# Altium PCB CHILD_BOARD_revA.PcbDoc (part 2 of 2)
Units mil, origin at the board's own origin, x right, y up, seen from the top; angles counter-clockwise.
Board outline 6000 x 4000 mil, 2 copper layers (Top Layer, Bottom Layer); 300 components, 212 nets, 880 pads, 8 vias.
Unrouted connection lines stored in the file: 627.
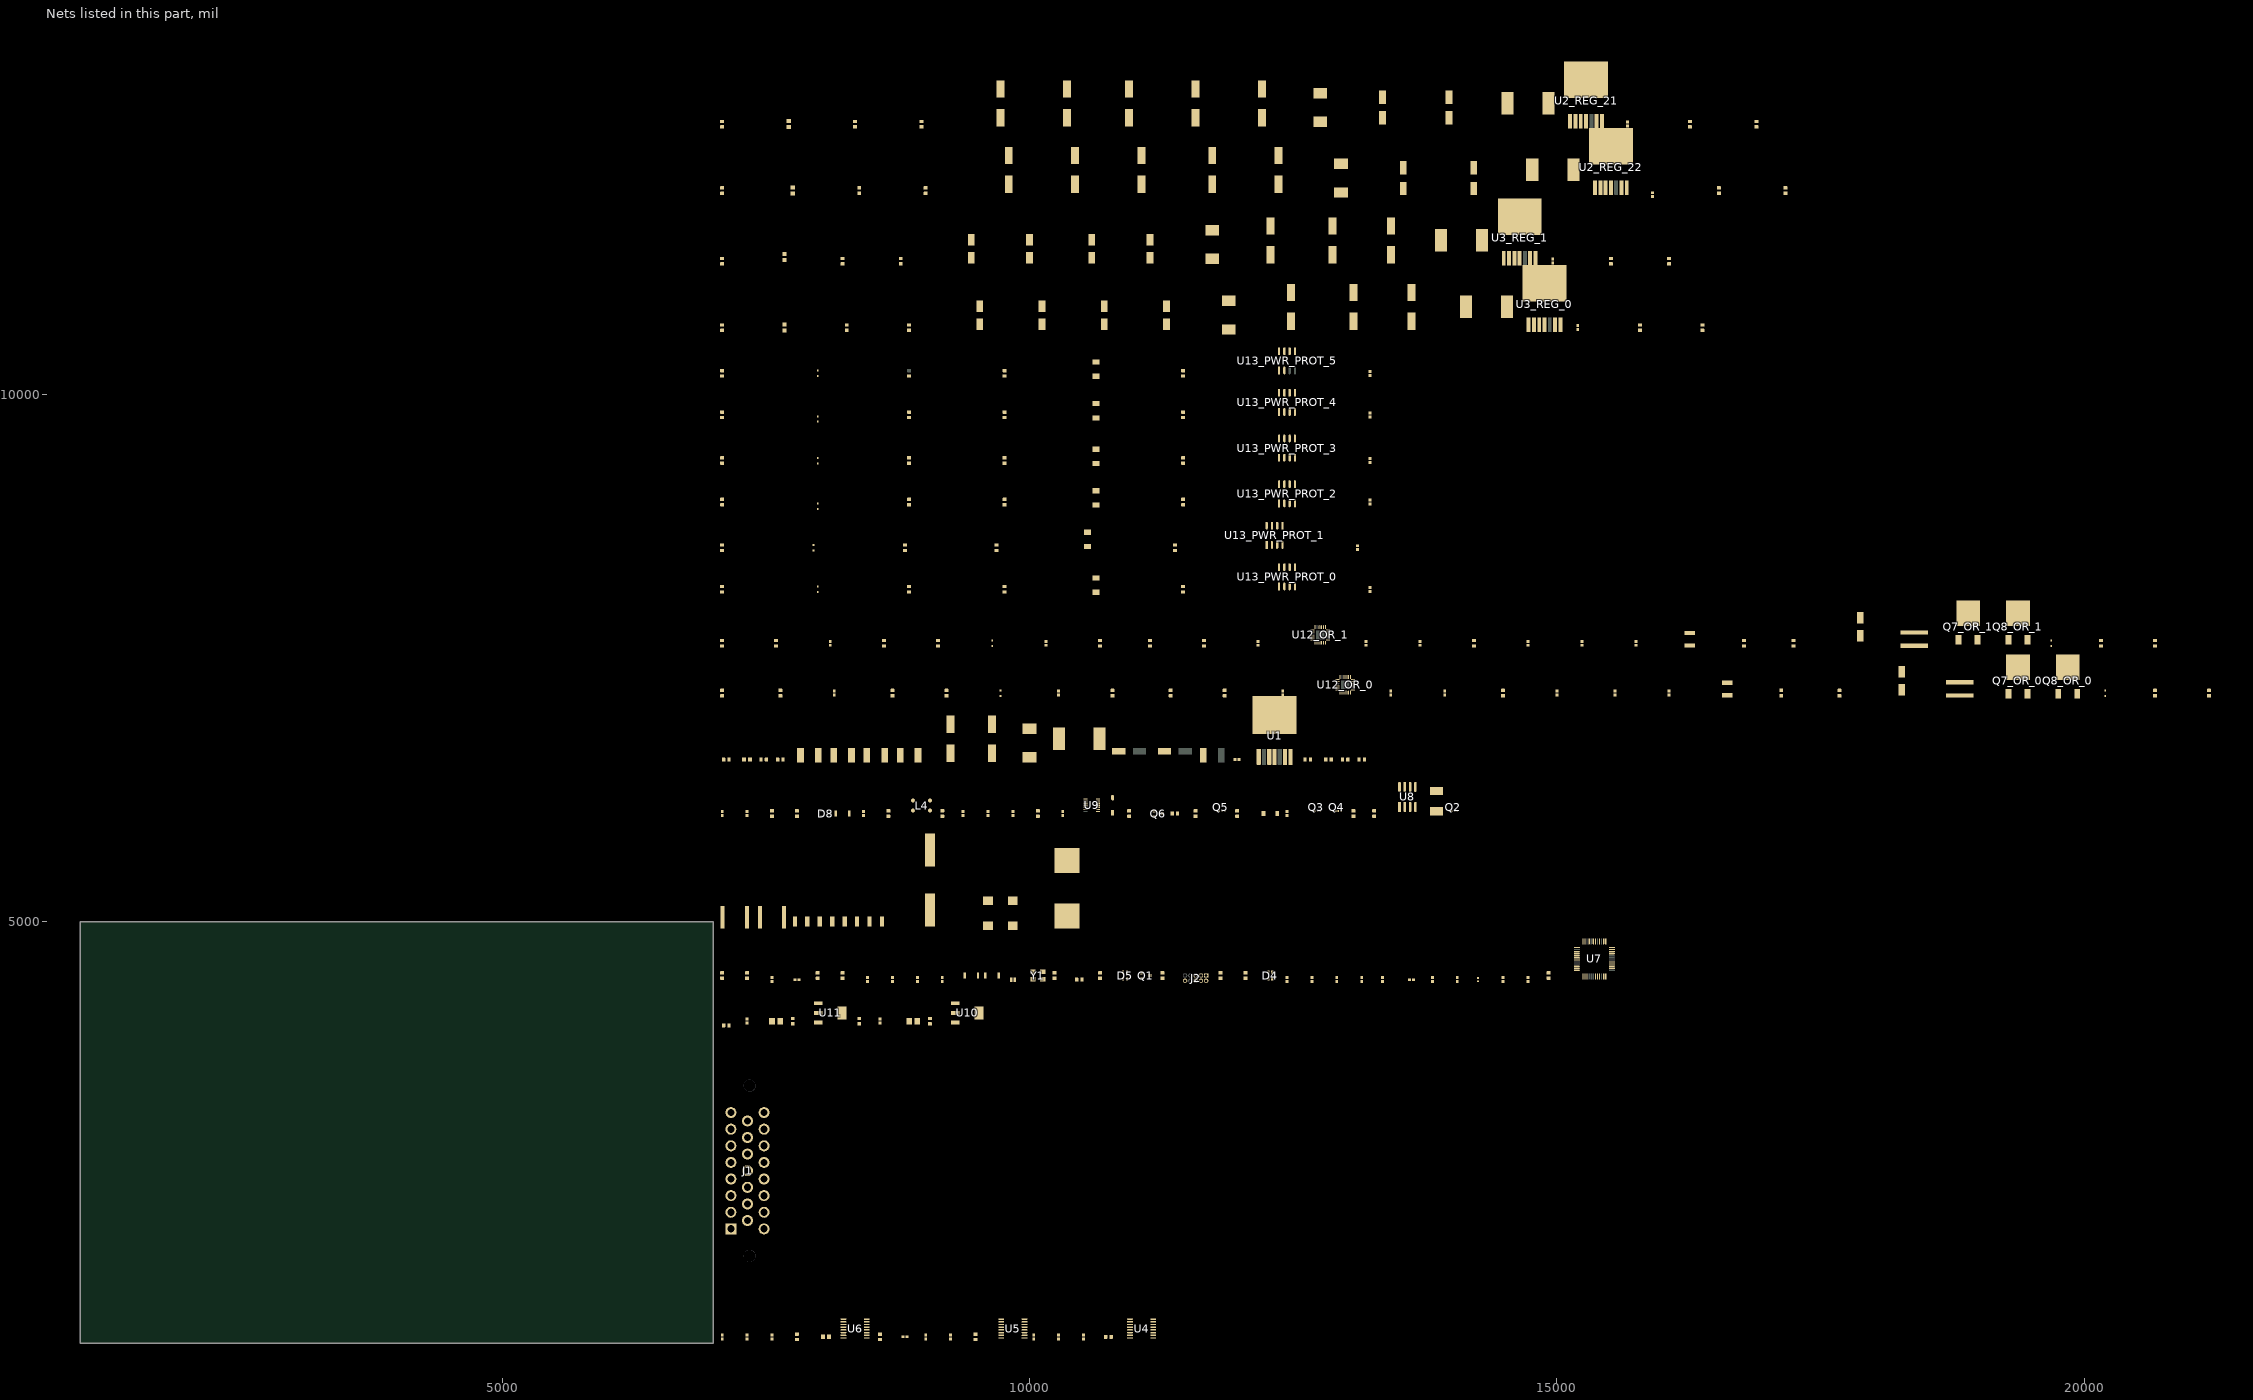
[diagram p2: the nets of this part, all layers, seen from the top]

## Part data
C1 C2 C12_REG_21 C12_REG_22 C13_REG_21 C13_REG_22: library part CMP-05428-001211-1, "Conductive Polymer Hybrid Aluminum Electrolytic Capacitors 68uF ±20% 35V RADIAL SMT 6.3x7.7mm", Capacitance=68uF, Case/Package=Radial, ESR (Equivalent Series Resistance)=35mR, Leakage Current=23.8uA, Max Operating Temperature=105°C, Min Operating Temperature=-55°C, Package Quantity=900, Ratings=AEC-Q200, Ripple Current=2A, Tolerance=20%, Voltage=35V, Construction=Cylindrical, Diameter=6.3mm, Height=7.7mm, Height - Seated (Max)=0.315inch, Lead Diameter=0.65mm, Lead Free="Lead Free", Lead Pitch=1.8mm, Length=7.7mm, Life (Hours)=5000Hour, Material=Polymer, Mount="Surface Mount", Number of Pins=8, Packaging="Tape and Reel", Polarity=Polar, Radiation Hardening=No, REACH SVHC="No SVHC", Ripple Current (AC)=2A, Series=ZA, Technology=HYBRID, Termination=SMD/SMT, Voltage Rating=35V, Voltage Rating (DC)=35V
C3 C7 C8 C9 C10: library part CMP-1040-01539-1, "CAP 470nF 50V ±10% 1812 (4532 Metric) Thickness 1.25mm SMD", Case-EIA=1812, Case-Metric=4532, Rated Voltage="50 V", Tolerance=Â±10%, Max Thickness="1.25 mm", Technology=SMT
C4 C11_REG_21 C11_REG_22 C19_REG_0 C19_REG_1 C27 C28 C29 C30 C31 C32 C33 C34 C35 C36 C37 C38 C39 C40 C41 C42 C43 C44 C45 C46 C47 C48 C49 C50 C51 C52 C53 C54 C55 C56 C57 C58 C59 C60 C62 C66_OR_0 C66_OR_1 C67_OR_0 C67_OR_1 C68_OR_0 C68_OR_1 C69_OR_0 C69_OR_1 C70_OR_0 C70_OR_1 C71_OR_0 C71_OR_1 C72_OR_0 C72_OR_1 C73_OR_0 C73_OR_1 C74_PWR_PROT_0 C74_PWR_PROT_1 C74_PWR_PROT_2 C74_PWR_PROT_3 C74_PWR_PROT_4 C74_PWR_PROT_5: library part CMP-001-00058-1, "LARGE PADS, 0402 CAP, CHANGE COMMENT TO MATCH REAL P/N", Capacitor Type=Ceramic, Case/Package=0402, Max Operating Temperature=85°C, Min Operating Temperature=-55°C, Mounting Technology="Surface Mount", Pins=2, RoHS Compliant=Yes
C5 C6 C14_REG_21 C14_REG_22 C15_REG_21 C15_REG_22 C16_REG_21 C16_REG_22 C17_REG_21 C17_REG_22 C18_REG_21 C18_REG_22: library part CMP-05428-000021-2, "Conductive Polymer Aluminum Solid Capacitors (OS-CON) 120uF ±20% 16V RADIAL SMT 8x6.9mm", Capacitance=120uF, Case/Package=Radial, ESR (Equivalent Series Resistance)=27mR, Leakage Current=500uA, Max Operating Temperature=105°C, Min Operating Temperature=-55°C, Package Quantity=1000, Ripple Current=2.9A, Tolerance=20%, Voltage=16V, Construction=Cylindrical, Diameter=8mm, Dissipation Factor=12%, Height=6.9mm, Height - Seated (Max)=0.276inch, Lead Free="Lead Free", Length=6.9mm, Life (Hours)=2000Hour, Mount="Surface Mount", Number of Pins=7, Packaging="Tape and Reel", Polarity=Polar, REACH SVHC="No SVHC", Ripple Current (AC)=2.9A, RoHS Compliant=Yes, Series="OS-CON, SVPC", Termination=SMD/SMT, Voltage Rating=16V, Voltage Rating (DC)=16V
C20_REG_0 C20_REG_1 C21_REG_0 C21_REG_1 C22_REG_0 C22_REG_1: library part CMP-05428-001387-1, "Conductive Polymer Aluminum Solid Capacitors (OS-CON) 33uF ±20% 20V RADIAL SMT 8x6.9mm", Capacitance=33uF, Case/Package=Radial, ESR (Equivalent Series Resistance)=45mR, Leakage Current=132uA, Max Operating Temperature=105°C, Min Operating Temperature=-55°C, Package Quantity=1000, Ripple Current=1.89A, Tolerance=20%, Voltage=20V, Construction=Cylindrical, Diameter=8mm, Dissipation Factor=12%, Height=6.9mm, Height - Seated (Max)=0.276inch, Length=6.9mm, Life (Hours)=2000Hour, Mount="Surface Mount", Number of Pins=7, Packaging="Tape and Reel", Polarity=Polar, REACH SVHC="No SVHC", Ripple Current (AC)=1.89A, RoHS Compliant=Yes, Series="OS-CON™, SVP", Termination=SMD/SMT, Voltage Rating=20V, Voltage Rating (DC)=20V
C23_REG_0 C23_REG_1 C24_REG_0 C24_REG_1 C25_REG_0 C25_REG_1 C26_REG_0 C26_REG_1: library part CMP-05427-000047-1, "CAP ALUM 100UF 20% 10V SMD", Capacitance=100uF, Case/Package=Radial, Max Operating Temperature=85°C, Min Operating Temperature=-40°C, Package Quantity=1, Ripple Current=50mA, Tolerance=20%, Voltage Rating=10V, Construction=Cylindrical, Contact Plating=Tin, Diameter=5mm, Height=5.4mm, Height - Seated (Max)=0.213inch, Lead Free="Lead Free", Length=5.5mm, Life (Hours)=1000Hour, Mount="Surface Mount", Packaging="Tape and Reel", Radiation Hardening=No, Ripple Current (AC)=50mA, RoHS Compliant=Yes, Series=S, Termination=SMD/SMT, Voltage Rating (DC)=10V
C61 C63: library part CMP-001-00000-11, "Non-polarized capacitor"
C64_OR_0 C64_OR_1: library part CMP-05427-000030-1, "CAP ALUM 10UF 20% 50V SMD", Capacitance=10uF, Case/Package=Radial, Dielectric Material=Aluminium, ESR (Equivalent Series Resistance)=1.52R, Leakage Current=3uA, Max Operating Temperature=105°C, Min Operating Temperature=-55°C, Package Quantity=1000, Ripple Current=85mA, Tolerance=20%, Voltage=50V, Construction=Cylindrical, Contact Plating=Tin, Diameter=5mm, Height=5.8mm, Height - Seated (Max)=0.228inch, Impedance=1.52R, Lead Free="Lead Free", Length=5.8mm, Life (Hours)=2000Hour, Material=Aluminium, Mount="Surface Mount", Number of Pins=2, Packaging="Tape and Reel", Radiation Hardening=No, REACH SVHC="No SVHC", Ripple Current (AC)=85mA, RoHS Compliant=Yes, Series=FK, Termination=SMD/SMT, Voltage Rating=50V, Voltage Rating (DC)=50V, Width=6.5mm
C65_OR_0 C65_OR_1 C80 C81 C82 C83: library part CMP-2000-05477-2, "General Purpose Ceramic Capacitor, 1210, 10uF, 10%, X5R, 15%, 25V", Capacitance=10uF, Case Code (Imperial)=1210, Case Code (Metric)=3225, Dielectric=X5R, Max Operating Temperature=85°C, Min Operating Temperature=-55°C, Package Quantity=1, Tolerance=10%, Voltage=25V, Case/Package=1210, Construction=Flat, Contact Plating=Tin, Depth=2.5mm, Height=2.29mm, Lead Free="Lead Free", Length=3.2mm, Mount="Surface Mount", Packaging="Tape and Reel", Radiation Hardening=No, REACH SVHC="No SVHC", RoHS Compliant=Yes, Series=-, Termination=SMD/SMT, Thickness=0.11inch, Voltage Rating=25V, Voltage Rating (DC)=25V, Width=0.098inch
C75: library part CMP-001-00064-1, "Aluminum Electrolytic Capacitor, Polarized, Aluminum (wet), 100V, 20% +Tol, 20% -Tol, 470uF, Surface Mount, 7171", Capacitor Type=Aluminium, Case/Package=7171, Max Operating Temperature=105°C, Min Operating Temperature=-40°C, Pins=2, RoHS Compliant=Yes
C76 C77: library part CMP-2000-07204-2, "CAP TANT 100UF 10% 25V 2917", Capacitance=100uF, Case Code (Imperial)=2917, Case Code (Metric)=7343, Dielectric Material=Tantalum, ESR (Equivalent Series Resistance)=300mR, Leakage Current=25uA, Max Operating Temperature=125°C, Min Operating Temperature=-55°C, Package Quantity=1, Ripple Current=742mA, Tolerance=10%, Voltage=25V, Case/Package=2917, Construction=Flat, Depth=4.3mm, Dissipation Factor=8%, Failure Rate=0.001%, Features="General Purpose", Height=4mm, Height - Seated (Max)=0.169inch, Lead Free="Lead Free", Length=7.3mm, Life (Hours)=2000Hour, Mount="Surface Mount", Number of Pins=2, Packaging="Tape and Reel", Polarity=Polar, Radiation Hardening=No, REACH SVHC="No SVHC", RoHS Compliant=No, Series=T491, Termination=SMD/SMT, Voltage Rating=25V, Voltage Rating (DC)=25V, Width=4.3mm
C78 C79: library part CMP-2000-07446-2, "Cap Ceramic 15uF 100V X7S 20% Pad SMD 2220 +125°C Automotive T/R", Capacitance=15uF, Case Code (Imperial)=2220, Case Code (Metric)=5750, Dielectric=X7S, Max Operating Temperature=125°C, Min Operating Temperature=-55°C, Package Quantity=1, Ratings=AEC-Q200, Tolerance=20%, Voltage Rating=100V, Case/Package=2220, Composition=Ceramic, Depth=5mm, Height=2.3mm, Lead Free="Lead Free", Length=5.7mm, Mount="Surface Mount", Packaging="Tape and Reel", REACH SVHC="No SVHC", Termination=SMD/SMT, Thickness=0.098inch, Voltage Rating (DC)=100V, Weight=0.016932oz, Width=0.197inch
D1 D2_REG_21 D2_REG_22 D3_REG_0 D3_REG_1: library part CMP-2000-05097-3, "DIODE SCHOTTKY 40V 5A SMC", Capacitance=300pF, Forward Current=5A, Manufacturer="Diodes Inc.", Max Junction Temp=+150°C, Max Repetitive Reverse Voltage=40V, Max Surge Forward Current=100A, Package=SMC, Peak Reverse Current=0.5mA, Temperature="-55°C to +150°C", Temperature Range Low=-55°C, Automotive=No, Automotive Grade=NA, Category=Diode, ComponentLink2Description=Datasheet, ComponentLink2URL=https://www.diodes.com/assets/Datasheets/ds13012.pdf, Device Class L1="Discrete Semiconductors", Device Class L2=Diodes, Device Class L3="Schottky Diodes", Digikey Description="DIODE SCHOTTKY 40V 5A SMC", Footprint Url=https://www.diodes.com/assets/Package-Files/SMC.pdf, Height=2.5mm, Lead Free=Yes, Manufacturer Part Number=B540C-13-F, Mouser Description="Diode: Schottky rectifying; SMD; 40V; 5A; SMC; Package: reel, tape", Octopart=https://octopart.com/b540c-13-f-diodes+inc.-325873, Reverse Voltage=40V, RoHS=TRUE, Standoff Height=0.1mm, Temperature Range High=+150°C
D4 D5: library part CMP-004-00040-2, "Led, Red/Grn, 180Mcd/230Mcd, 624Nm/525Nm Rohs Compliant: Yes", Component Type=Standard, Design Item ID=CMP-004-00034-2, Pins=4, Source=rgled.SchLib
D6: library part CMP-1060-00565-1, "Zener Voltage Regulator, 500 mW, 2-Pin SOD-123, Pb-Free, Tape and Reel", Manufacturer="On Semiconductor", ComponentLink1Description="Manufacturer URL", ComponentLink1URL=http://www.onsemi.com/, ComponentLink2Description=Datasheet, ComponentLink2URL=http://www.onsemi.com/pub_link/Collateral/MMSZ5221BT1-D.PDF, ComponentLink3Description="Package Specification", ComponentLink3URL=http://www.onsemi.com/pub_link/Collateral/425-04.PDF, DatasheetVersion="Rev. 12", Mounting Technology="Surface Mount", P Max (W)=0.5, PackageDescription="2-Pin SOD, Body 1.6 x 2.69 mm", PackageReference=SOD-123-2-425-04, PackageVersion="Rev. G, 10/2009", Packing="Tape and Reel", PartNumber=MMSZ5242BT1G, RoHS=Pb-Free, VZ Typ (V)=12
D7: library part CMP-2000-04993-2, "DIODE GEN PURP 100V 150MA SOD123", Average Rectified Current=150mA, Capacitance=4pF, Forward Voltage=1V, Max Forward Surge Current (Ifsm)=1A, Max Operating Temperature=150°C, Max Repetitive Reverse Voltage (Vrrm)=100V, Max Reverse Leakage Current=5uA, Max Surge Current=2A, Min Operating Temperature=-65°C, Package Quantity=3000, Power Dissipation=400mW, Current Rating=150mA, Element Configuration=Single, Forward Current=150mA, Height=1.2mm, Lead Free="Lead Free", Length=2.85mm, Max Reverse Voltage (DC)=100V, Mount="Surface Mount", Number of Pins=2, Output Current=150mA, Packaging="Tape and Reel", Peak Non-Repetitive Surge Current=2A, Polarity=Standard, Radiation Hardening=No, Recovery Time=4ns, Reverse Recovery Time=4ns, Voltage Rating (DC)=100V, Width=1.8mm
D8: library part CMP-12225-000055-1, "TVS DIODE 26.5V 44V SOT323-3", Breakdown Voltage=28.5V, Capacitance=3pF, Clamping Voltage=44V, Manufacturer=STMicroelectronics, Max Junction Temp=+175°C, Package=SOT323-3L, Peak Pulse Current=3A, Peak Pulse Power=170W, Reverse Standoff Voltage=26.5V, Temperature="-55°C to +175°C", Temperature Range Low=-55°C, Automotive=Yes, Automotive Grade="Grade 0", Category=Diode, ComponentLink2Description=Datasheet, ComponentLink2URL=https://www.st.com/resource/en/datasheet/esdcan02-2bwy.pdf, Device Class L1="Circuit Protection", Device Class L2="TVS Diodes", Device Class L3=unset, Digikey Description="TVS DIODE 26.5V 44V SOT323-3", Direction=Bidirectional, Height=1.1mm, Ipc Land Pattern Name=SOT65P210X95-3, Lead Free=Yes, Manufacturer Part Number=ESDCAN02-2BWY, Mouser Description="TVS Diodes / ESD Suppressors Automotive dual-line Transil, Transient voltage suppressor (TVS) for CAN bus", Number Of Channels=2, Octopart=https://octopart.com/esdcan02-2bwy-stmicroelectronics-58631133, RoHS=TRUE, Standoff Height=0mm, Temperature Range High=+175°C
D9_OR_0 D9_OR_1 D10_OR_0 D10_OR_1 D11_PWR_PROT_0 D11_PWR_PROT_1 D11_PWR_PROT_2 D11_PWR_PROT_3 D11_PWR_PROT_4 D11_PWR_PROT_5: library part CMP-1060-00750-1, "Zener Voltage Regulator, 500 mW, 2-Pin SOD-523, Pb-Free, Tape and Reel", Manufacturer="On Semiconductor", PartNumber=MM5Z3V3T1G, ComponentLink1Description="Manufacturer URL", ComponentLink1URL=http://www.onsemi.com/, ComponentLink2Description=Datasheet, ComponentLink2URL=http://www.onsemi.cn/pub_link/Collateral/MM5Z2V4T1-D.PDF, ComponentLink3Description="Package Specification", ComponentLink3URL=http://www.onsemi.com/pub_link/Collateral/502-01.PDF, DatasheetVersion="Rev. 10", Mounting Technology="Surface Mount", P Max (W)=0.5, PackageDescription="2-Pin SOD, Body 1.2 x 0.8 mm", PackageReference=SOD-523-2-502-01, PackageVersion="Rev. E, 09/2010", Packing="Tape and Reel", RoHS=Pb-Free, VZ Typ (V)=3.3
F1: library part CMP-16042-000002-1, "DIFF P#!!! /  / FUSE BRD MNT 10A 125VAC/VDC", Fuse Current=15A, Fuse Interrupt Ac Current=50A, Fuse Interrupt Dc Current=300A, Fuse Voltage Drop=0.13V, Manufacturer="Bel Fuse", Manufacturer Part Number=0679L9150-01, Max Fuse Ac Voltage=125V, Package=0679L, Resistance=0.0038Ω, Temperature="-55°C to +125°C", Temperature Range High=+125°C, Temperature Range Low=-55°C, Automotive=Yes, Automotive Grade="Grade 1", Category=Fuse, ComponentLink2Description=Datasheet, ComponentLink2URL=https://www.belfuse.com/resources/CircuitProtection/datasheets/0679L%20Sep2016.pdf, Device Class L1="Circuit Protection", Device Class L2=Fuses, Device Class L3=unset, Digikey Description="FUSE BRD MNT 15A 125VAC/VDC", Fuse Blow Speed=Fast, Fuse I2T=103.5A2Sec, Height=2.79mm, Ipc Land Pattern Name=CAPC610254X254, Lead Free=Yes, Max Fuse Dc Voltage=125V, Octopart=https://octopart.com/0679l9150-01-bel+fuse-70850665, RoHS=TRUE, Voltage Rating=125V
F2_PWR_PROT_0 F2_PWR_PROT_1 F2_PWR_PROT_2 F2_PWR_PROT_3 F2_PWR_PROT_4 F2_PWR_PROT_5: library part CMP-07399-000013-1, "FUSE BOARD MOUNT 2A 63VDC 1206", Case Code (Imperial)=1206, Case Code (Metric)=3216, Current Rating=2A, Max Operating Temperature=105°C, Min Operating Temperature=-20°C, Voltage Rating (DC)=63V, Approvals=UL, Case/Package=1206, Fuse Type="Board Mount (Cartridge Style Excluded)", Mount="Surface Mount", Packaging="Cut Tape", RoHS Compliant=Yes, Series="SinglFuse™ SF-1206FP"
FB1: library part CMP-0686-00252-4, "Chip Ferrite Bead, 0402, 600Ω @ 100MHz, 0.23Ω, 25%, 900mA", Case Code (Imperial)=0402, Case Code (Metric)=1005, Current Rating=900mA, DC Resistance (DCR)=230mR, Max Operating Temperature=125°C, Min Operating Temperature=-55°C, Package Quantity=10000, Test Frequency=100MHz, Tolerance=25%, Case/Package=0402, Height=0.5mm, Impedance=600R, Lead Free="Lead Free", Length=1mm, Material=Steel, Max Current Rating=900mA, Max DC Current=900mA, Number of Circuits=1, Number of Lines=1, Number of Pins=2, Packaging="Tape and Reel", Termination=SMD/SMT, Width=0.5mm
J1: library part CMP-03369-000157-2, "CONN HEADER R/A 23POS 4MM", Color=Black, Current Rating=17A, Flammability Rating="UL94 V-0", Max Operating Temperature=221°C, Max Voltage Rating (AC)=250V, Min Operating Temperature=-40°C, Package Quantity=1, Circuit Application=Power, Connector System=Wire-to-Device, Connector Type=Header, Contact Finish - Mating=TIN, Contact Material=Brass, Contact Plating=Tin, Contact Shape=Circular, Contact Type="Male Pin", Depth=37.9mm, ELV=Compliant, Fastening Type=Ramp, Gender=Male, Housing Color=Black, Housing Material=Polybutylene, Insulation Color=Black, Insulation Material=PBT, Lead Free="Lead Free", Length=60.8mm, Mount="Through Hole", Number of Contacts=23, Number of Ports=1, Number of Positions=23, Number of Rows=3, Number of Signal Positions=23, Number of Terminals/Pins=23, Orientation="Right Angle", Packaging=Bulk, PCB Mount Alignment="Yes (With)", PCB Mount Retention=With, PCB Thickness=0.062inch, Pitch=0.157inch, Primary Type=Rectangular, Radiation Hardening=No, RoHS Compliant=Yes, Row Spacing=0.157inch, Sealable="Yes (With)", Series=Ampseal, Shielding=Unshielded, Tab Thickness=1.3mm, Termination=Solder, Voltage Rating (AC)=250V, Width=37.9mm
J2: library part CMP-002-00041-5, "Board Connector, 10 Contact(s), 2 Row(s), Male, Right Angle, 0.05 inch Pitch, Surface Mount Terminal, Locking, Black Insulator", Connector Type="BOARD CONNECTOR", Mounting Technology=Board, RoHS Compliant=Yes
L1: library part CMP-2000-07146-2, "FIXED IND 15UH 5A 27 MOHM SMD", Case/Package=1260, Current Rating=5A, DC Resistance (DCR)=27mR, Frequency=17.6MHz, Inductance=15uH, Inductance Tolerance=20%, Max Operating Temperature=125°C, Min Operating Temperature=-40°C, Package Quantity=600, Resistance=27MR, Resistor Type=Wirewound, Saturation Current=4.6A, Test Frequency=100kHz, Core Material=Ferrite, DC Current=5A, Depth=12.8mm, Height=6mm, Height - Seated (Max)=0.256inch, Length=12.5mm, Material=Steel, Max DC Current=5A, Military Standard=Not, Mount="Surface Mount", Number of Pins=2, Packaging="Tape and Reel", Q Factor=25, REACH SVHC="No SVHC", RMS Current (Irms)=5A, RoHS Compliant=Yes, Sample Rate (Hz)=100kHz, Self Resonant Frequency=17.6MHz, Series=SRR1260, Shielding=Shielded, Termination=SMD/SMT, Tolerance=20%, Width=12.5mm
L2_REG_21 L2_REG_22 L3_REG_0 L3_REG_1: library part CMP-0227-00708-1, "SMD-Shielded Power Inductor WE-PD, L = 10.0 µH", Inductance="10.0 ÂµH", ComponentLink1Description="Manufacturer Link", ComponentLink1URL=http://www.we-online.com, ComponentLink2Description=Datasheet, ComponentLink2URL=http://www.we-online.de/katalog/media/pdf/74477110.pdf, DatasheetVersion="ver 7, Sep-2006", PackageDescription="SMD Inductor, 2-Leads, Body 12.0 x 12.0 mm", PackageReference=WE-PD-L, PackageVersion=2006
L4: library part CMP-07251-000006-1, "CMC 51UH 200MA 2LN 2KOHM SMD", Case/Package=4532, Current=200mA, DC Resistance (DCR)=3.5R, Inductance=51uH, Insulation Resistance=10MR, Max Operating Temperature=125°C, Min Operating Temperature=-40°C, Package Quantity=1, Resistance=2kR, Self Resonant Frequency=100kHz, Tolerance=50%, Voltage Rating (DC)=50V, Contact Plating=Tin, Core Material=Ferrite, Current Rating=200mA, DC Current=200mA, Depth=3.4mm, Element Configuration=Dual, Height=0.118inch, Impedance=2kR, Lead Free="Lead Free", Length=4.5mm, Material=Steel, Max DC Current=200mA, Mount="Surface Mount", Number of Lines=2, Packaging="Tape and Reel", REACH SVHC="No SVHC", RoHS Compliant=Yes, Series=SRF4532, Termination=SMD/SMT, Test Frequency=100kHz, Width=0.126inch
L5: library part CMP-0226-00001-2, Ambient Temperature Range High=100°C, Ambient Temperature Range Low=-40°C, DC Resistance (DCR)=6.9mΩ, Inductance=10µH, Inductance Tolerance=20%, Max Operating Temperature=150°C, Saturation Current=10A, Self Resonant Frequency=14MHz, Height=8.9mm, Length=18.3mm, Min Operating Temperature=-40°C, NexarPartId=22803350, Number of Pins=2, Packaging="Cut Tape (CT)", RoHS=Compliant, Width=18.2mm
Q1: library part CMP-2000-06170-1, "P-Channel Enhancement Mode MOSFET, 310 mW, 20 V, -55 to 150 degC, 3-Pin SOT-323, RoHS, Tape and Reel", Drain-Source On Resistance-Max=750mO, Drain-to-Source Voltage [Vdss]=20V, Manufacturer="Diodes Inc", Package Description="3-Pin Small Outline Transistor, Body 2 x 1.25 mm, Pitch 0.65 mm", Package Reference=SOT323, Rated Power Dissipation=310mW, Channel Type=P-Channel, Datasheet URL=http://www.diodes.com/_files/datasheets/ds31861.pdf, Datasheet Version="Rev. 3-2, 09/2013", Manufacturer URL=http://www.diodes.com/, Mounting Technology=SurfaceMount, Qg Gate Charge=0.622nC
Q2 Q3 Q4 Q5: library part CMP-013-00018-2, "Trans MOSFET P-CH 20V 22.1A 8-Pin PowerPAK 1212 EP T/R", Component Type=Standard, Design Item ID=CMP-013-00036-4, Pins=5, Source=SISH615ADN-T1-GE3.SchLib
Q6: library part CMP-2000-05968-1, "N-Channel Enhancement Mode Mosfet, 50 V, 200 mA, -55 to 150 degC, 6-Pin SOT-323, RoHS, Tape and Reel", Id - Continuous Drain Current=200mA, Manufacturer=DiodesIncorporated, Maximum Operating Temperature=+150C, Minimum Operating Temperature=-55C, Package / Case=SOT-323-3, Package Description="3-Pin Small Outline Transistor, Body 2 x 1.25 mm, Pitch 0.65 mm", Package Reference=SOT323, Pd - Power Dissipation=200mW, Rds On - Drain-Source Resistance=1.4Ohms, Vds - Drain-Source Breakdown Voltage=75V, Vgs - Gate-Source Voltage=20V, Brand=DiodesIncorporated, Channel Mode=Enhancement, Configuration=Single, Datasheet URL=http://www.diodes.com/_files/datasheets/ds30206.pdf, Datasheet Version="Rev. 11-2, 09/2013", Factory Pack Quantity=3000, Forward Transconductance - Min=0.1S, Height=1mm, Length=2.2mm, Manufacturer URL=http://www.diodes.com/, Mounting Style=SMD/SMT, Mounting Technology=SurfaceMount, Number Of Channels=1Channel, Packaging=Reel, Product=MOSFETSmallSignal, Product Category=MOSFET, RoHS=True, Series=BSS138, Technology=Si, Transistor Polarity=N-Channel, Transistor Type=1N-Channel, Type=EnhancementModeFieldEffectTransistor, Typical Turn-Off Delay Time=20ns, Typical Turn-On Delay Time=20ns, Unit Weight=0.000212oz, Width=1.35mm
Q7_OR_0 Q7_OR_1 Q8_OR_0 Q8_OR_1: library part CMP-02550-000179-1, "MOSFET N-CH 150V 42A TO252AA", Continuous Drain Current=42A, Drain To Source Breakdown Voltage=150V, Drain To Source Resistance=0.0372Ω, Gate To Source Voltage=20V, Input Capacitace At Vds="560pF @ 50V", Manufacturer=Vishay, Max Forward Diode Voltage=1.5V, Max Junction Temp=+175°C, Package=T16-0236, Power Dissipation=65.2W, Pulse Drain Current=40A, Temperature="-55°C to +175°C", Temperature Range Low=-55°C, Typ Forward Diode Voltage=0.85V, Automotive=No, Category=Trans, ComponentLink2Description=Datasheet, ComponentLink2URL=https://www.vishay.com/docs/76248/sud80460e.pdf, Depletion Mode=False, Device Class L1="Discrete Semiconductors", Device Class L2=Transistors, Device Class L3=MOSFETs, Digikey Description="MOSFET N-CH 150V 42A TO252AA", Drain To Source Voltage=150V, Footprint Url=https://www.vishay.com/docs/71197/to252aa.pdf, Gate Charge At Vgs="10.5nC @ 10V", Height=2.507mm, Lead Free=Yes, Manufacturer Part Number=SUD80460E-GE3, Number Of Channels=1, Number Of N Channels=1, Octopart=https://octopart.com/sud80460e-ge3-vishay-78440626, Reverse Recovery Charge=210nC, Reverse Recovery Time=68ns, RoHS=TRUE, Rthja Max=50°C/W, Temperature Range High=+175°C, Threshold Vgs Max=4V, Threshold Vgs Min=2V, Transconductance=11S, Turn Off Delay Time=15ns, Turn On Delay Time=8ns
R1 R2 R3 R4 R5 R6 R7 R9_REG_21 R9_REG_22 R10_REG_21 R10_REG_22 R11_REG_21 R11_REG_22 R12_REG_21 R12_REG_22 R13_REG_21 R13_REG_22 R15_REG_0 R15_REG_1 R16_REG_0 R16_REG_1 R17_REG_0 R17_REG_1 R18_REG_0 R18_REG_1 R19_REG_0 R19_REG_1 R21 R22 R23 R25 R26 R27 R28 R29 R30 R31 R32 R33 R34 R35 R36 R37 R38 R39 R40 R41 R42 R43 R44 R45 R46 R47 R48 R49 R50 R51 R52_OR_0 R52_OR_1 R53_OR_0 R53_OR_1 R55_OR_0 R55_OR_1 R56_OR_0 R56_OR_1 R57_OR_0 R57_OR_1 R58_OR_0 R58_OR_1 R59_OR_0 R59_OR_1 R60_OR_0 R60_OR_1 R61_OR_0 R61_OR_1 R62_OR_0 R62_OR_1 R63_OR_0 R63_OR_1 R64_OR_0 R64_OR_1 R65_PWR_PROT_0 R65_PWR_PROT_1 R65_PWR_PROT_2 R65_PWR_PROT_3 R65_PWR_PROT_4 R65_PWR_PROT_5 R66_PWR_PROT_0 R66_PWR_PROT_1 R66_PWR_PROT_2 R66_PWR_PROT_3 R66_PWR_PROT_4 R66_PWR_PROT_5 R67_PWR_PROT_0 R67_PWR_PROT_1 R67_PWR_PROT_2 R67_PWR_PROT_3 R67_PWR_PROT_4 R67_PWR_PROT_5 R68_PWR_PROT_0 R68_PWR_PROT_1 R68_PWR_PROT_2 R68_PWR_PROT_3 R68_PWR_PROT_4 R68_PWR_PROT_5: library part CMP-009-00002-14, "Resistor"
R8 R14_REG_21 R14_REG_22 R20_REG_0 R20_REG_1 R24: library part CMP-2000-00869-1, Manufacturer=Panasonic, Part Number=ERT-J1VR103J
R54_OR_0 R54_OR_1: library part CMP-00597-24927456-1, "KRL6432E-M-R003-F-T1 Metal Foil Low Resistance Chip Resistor (long-side terminal), 2512, RoHS", Case Code (Imperial)=2512, Case Code (Metric)=6432, Max Operating Temperature=155°C, Min Operating Temperature=-55°C, Power Rating=3W, Resistance=3mΩ, Temperature Coefficient=50ppm/°C, Tolerance=1%, Case/Package=2512, Composition="Metal Foil", Height=700µm, Length=3.1mm, Lifecycle Status=Production, Max Thickness=700µm, NexarPartId=24927456, RoHS=Compliant, Termination=SMD/SMT, Weight=40.511469mg, Width=6.3mm
SW1 SW2 SW3: library part CMP-10040-000029-1, "SWITCH TACTILE SPST-NO 0.02A 15V", Current Rating=5A, Flammability Rating="UL94 V-0", Insulation Color=Black, Max Operating Temperature=85°C, Min Operating Temperature=-40°C, Operating Force=240gf, Actuator Type=Standard, Connector Type=USB, Contact Plating=Gold, Gender=Receptacle, Illumination Type=Non-Illuminated, Mechanical Life=500000Cycles, Mount="Surface Mount", Number of Contacts=24, Number of Ports=1, Packaging="Tape and Reel", Switch Function=Off-Mom, Switch Travel=0.13mm, Termination=Solder, Throw Configuration=SPST
U1: library part CMP-0069-00211-3, "SIMPLE SWITCHER® High Efficiency 5A Step-Down Voltage Regulator with Sync, 7-pin TO-263", Manufacturer="Texas Instruments", PackageTopMarking=NSUZXYTTE#*LM2677S*-ADJ, PowerWise=N, Code_JEDEC=MO-169-AC, ComponentLink1Description="Datasheet URL", ComponentLink1URL=http://www.ti.com/general/docs/lit/getliterature.tsp?genericPartNumber=LM2677&fileType=pdf, CompType=Switcher, PackageDescription="TO-263, Molded, .400 x .390 x .180in Body, 7 Lead, .050in Pitch, Surface Mount", PackageReference=KTW0007B, PinCount=7, RoHS=N
U2_REG_21 U2_REG_22: library part CMP-0069-00195-3, "SIMPLE SWITCHER® High Efficiency 5A Step-Down Voltage Regulator, 7-pin TO-263, Pb-Free", Manufacturer="Texas Instruments", PackageTopMarking=NSUZXYTTE#*LM2678*S-3.3, PowerWise=N, Code_JEDEC=MO-169-AC, ComponentLink1Description="Datasheet URL", ComponentLink1URL=http://www.ti.com/general/docs/lit/getliterature.tsp?genericPartNumber=LM2678&fileType=pdf, CompType=Switcher, PackageDescription="TO-263, Molded, .400 x .390 x .180in Body, 7 Lead, .050in Pitch, Surface Mount", PackageReference=KTW0007B, PinCount=7, RoHS=Y
U3_REG_0 U3_REG_1: library part CMP-0069-00190-3, "SIMPLE SWITCHER® High Efficiency 5A Step-Down Voltage Regulator, 7-pin TO-263", Manufacturer="Texas Instruments", PackageTopMarking=NSUZXYTTE#*LM2678*S-5.0, PowerWise=N, Code_JEDEC=MO-169-AC, ComponentLink1Description="Datasheet URL", ComponentLink1URL=http://www.ti.com/general/docs/lit/getliterature.tsp?genericPartNumber=LM2678&fileType=pdf, CompType=Switcher, PackageDescription="TO-263, Molded, .400 x .390 x .180in Body, 7 Lead, .050in Pitch, Surface Mount", PackageReference=KTW0007B, PinCount=7, RoHS=N
U4 U5 U6: library part CMP-0054-00372-2, "8-Channel, 50 kSPS to 200 kSPS, 8-Bit A/D Converter, 16-pin TSSOP, Pb-Free", Manufacturer="National Semiconductor", PackageTopMarking=NSUZXYTT*88S022*CIMT, PowerWise=Y, Code_JEDEC=MO-153-AB, ComponentLink1Description="ADC088S022 Datasheet", ComponentLink1URL=http://www.national.com/ds/AD/ADC088S022.pdf, ComponentLink2Description="ADC088S022 Web Page", ComponentLink2URL=http://www.national.com/pf/AD/ADC088S022.html, ComponentLink3Description="MTC16 Package Page", ComponentLink3URL=http://www.national.com/packaging/folders/mtc16.html, CompType="ADC IC", DatasheetVersion=Feb-2010, PackageDescription="Molded TSSOP, Jedec, 5 x 4.4 x 0.9mm Body, 16 Lead, 0.65mm Pitch", PackageReference=MTC16, PackageVersion="revD, Jun-2003", PinCount=16, RevisionNote="Component URLs added", RoHS=Y
U7: library part CMP-020-00018-2, "RISC Microcontroller, 32-Bit, 170MHz", RoHS Compliant=Yes
U8: library part CMP-1557-00015-2, "SENSOR CURRENT HALL 25A AC/DC", Case/Package=SOIC, Current Sensing=25A, Frequency=100kHz, Max Operating Temperature=125°C, Max Supply Current=5.5mA, Max Supply Voltage=5.5V, Min Operating Temperature=-40°C, Min Supply Voltage=3V, Operating Supply Voltage=3.3V, Package Quantity=1, Quiescent Current=4mA, -3db Bandwidth=100kHz, Accuracy=4%, Bandwidth=100kHz, Height=1.5mm, Length=4.9mm, Linearity=1%, Number Of Channels=1, Number of Pins=8, Packaging="Tape and Reel", Polarity=Bidirectional, REACH SVHC="No SVHC", Response Time=4.6us, RoHS Compliant=Yes, Sensitivity=55mV/A, Series=-, Width=3.9mm
U9: library part CMP-318-000000-2, "Automotive CAN FD transceiver with watchdog, bus diagnostics and partial networking via sele 14-SOT-23-THIN -40 to 150", Component Type=Standard, Design Item ID=CMP-015-00012-2, Pin Count=14, Source=TCAN1146DYYRQ1.SchLib
U10: library part CMP-0244-00312-1, "Fixed Low Drop Positive Voltage Regulator, 5V, 4-Pin SOT-223, Tape and Reel", ComponentLink1Description="Manufacturer URL", ComponentLink1URL=http://www.st.com, ComponentLink2Description=Datasheet, ComponentLink2URL=http://www.st.com/internet/com/TECHNICAL_RESOURCES/TECHNICAL_LITERATURE/DATASHEET/CD00000544.pdf, DatasheetVersion=1/11/2011, PackageDescription="4-Pin SOT-223 Package, 6.5 x 3.5 mm Body, 2.3 mm Pitch, 7 mm Lead Span", PackageReference=SOT-223, PackageVersion=2010
U11: library part CMP-0244-00310-1, "Fixed Low Drop Positive Voltage Regulator, 3.3V, 4-Pin SOT-223, Tape and Reel", ComponentLink1Description="Manufacturer URL", ComponentLink1URL=http://www.st.com, ComponentLink2Description=Datasheet, ComponentLink2URL=http://www.st.com/internet/com/TECHNICAL_RESOURCES/TECHNICAL_LITERATURE/DATASHEET/CD00000544.pdf, DatasheetVersion=1/11/2011, PackageDescription="4-Pin SOT-223 Package, 6.5 x 3.5 mm Body, 2.3 mm Pitch, 7 mm Lead Span", PackageReference=SOT-223, PackageVersion=2010
U12_OR_0 U12_OR_1: library part CMP-019-00057-1, "Automotive ideal diode with circuit breaker, 200-kHz ACS, UV , OV protection and SLEEP mode 24-VQFN -40 to 125", Case/Package=VQFN, Pins=24
U13_PWR_PROT_0 U13_PWR_PROT_1 U13_PWR_PROT_2 U13_PWR_PROT_3 U13_PWR_PROT_4 U13_PWR_PROT_5: library part CMP-1557-00012-2, "SENSOR CURRENT HALL 12.5A AC/DC", Case/Package=SOIC, Current Sensing=12.5A, Frequency=100kHz, Max Operating Temperature=125°C, Max Supply Current=5.5mA, Max Supply Voltage=5.5V, Min Operating Temperature=-40°C, Min Supply Voltage=3V, Operating Supply Voltage=3.3V, Package Quantity=1, Quiescent Current=4mA, -3db Bandwidth=100kHz, Accuracy=5%, Bandwidth=100kHz, Height=1.5mm, Length=4.9mm, Linearity=1%, Number Of Channels=1, Number of Pins=8, Packaging="Tape and Reel", Polarity=Bidirectional, REACH SVHC="No SVHC", Response Time=4.6us, RoHS Compliant=Yes, Sensitivity=110mV/A, Series=-, Width=3.9mm
Y1: library part CMP-27762-011708-1, "Crystal 48MHz ±20ppm 18pF SMD-4 3.2mm x 2.5mm", Case/Package=CSMD, ESR (Equivalent Series Resistance)=35R, Frequency=48MHz, Frequency Stability=50ppm, Frequency Tolerance=20ppm, Load Capacitance=18pF, Max Operating Temperature=70°C, Min Operating Temperature=-20°C, Operating Frequency="48 MHz", Package Quantity=1000, Resistor Type=Ceramic, Depth=2.5mm, Height=0.031inch, Lead Free="Lead Free", Length=3.2mm, Mount="Surface Mount", Number of Pins=4, Packaging="Tape and Reel", Radiation Hardening=No, REACH SVHC="No SVHC", RoHS Compliant=Yes, Series=ABM8, Series Resistance=35R, Termination=SMD/SMT, Tolerance=20ppm, Width=0.098inch
Y2: library part CMP-40224-000006-1, "CRYSTAL 32.7680KHZ 12.5PF SMD", Frequency=32.768kHz, Load Capacitance=12.5pF, Manufacturer="ECS International", Package=ECX-1210, Temperature="-40°C to +85°C", Temperature Range High=+85°C, Temperature Range Low=-40°C, Tolerance=20ppm, Automotive=No, Category=Crys, ComponentLink2Description=Datasheet, ComponentLink2URL=https://ecsxtal.com/store/pdf/ECX-1210.pdf, Device Class L1="Passive Components", Device Class L2="Crystals / Oscillators", Device Class L3=Crystals, Digikey Description="CRYSTAL 32.7680KHZ 12.5PF SMD", ESR=90kΩ, Height=0.5mm, Lead Free=Yes, Manufacturer Part Number=ECS-.327-12.5-1210-TR, Octopart=https://octopart.com/ecs-.327-12.5-1210-tr-ecs+international-81221340, RoHS=TRUE, Series=ECX-1210

## Via types
v1: diameter 19.68, hole 11.81, Top Layer to Bottom Layer, 8 vias

## Nets (pads, with @x,y where several pads share a name; then routed paths per layer and width w, separated by ;. In a path a pad name is that pad's centre, name@x,y a point inside that pad or via, vN(x,y) a via of type N, cw(c..) or ccw(c..) an arc to the next point about the centre after c; other vN are vias at no path point)
2V_AUX_ENABLE: R6.1
2V_AUX_FB: R3.2 R4.1 U1.6
2V_AUX_OUT: C5.2 C6.2 C7.2 C8.2 C9.2 C10.2 L1.2 R1.1 R3.1
2V_REG_EN: R6.2 R7.1 U1.7
3V3: C36.1 C37.1 C38.1 C39.1 C42.1 C43.1 C50.2 FB1.1 J2.01 R26.2 R27.2 R31.2 R32.2 R36.1 SW1.2 U7.1 U7.24 U7.36 U7.48
3V3_3V3_V_SENSE: R50.2 R51.1
3V3_5V_V_SENSE: R48.2 R49.1
3V3_AUX_ENABLE: R12_REG_21.2 R12_REG_22.2
3V3_AUX_FB_REG_21: C14_REG_21.2 C15_REG_21.2 C16_REG_21.2 C17_REG_21.2 C18_REG_21.2 L2_REG_21.2 R9_REG_21.1 U2_REG_21.6
3V3_AUX_FB_REG_22: C14_REG_22.2 C15_REG_22.2 C16_REG_22.2 C17_REG_22.2 C18_REG_22.2 L2_REG_22.2 R9_REG_22.1 U2_REG_22.6
3V3_INT: C27.1 C30.1 C33.1 C63.1 C74_PWR_PROT_0.1 C74_PWR_PROT_1.1 C74_PWR_PROT_2.1 C74_PWR_PROT_3.1 C74_PWR_PROT_4.1 C74_PWR_PROT_5.1 R21.1 R22.1 R23.2 R25.1 R50.1 R58_OR_0.2 R58_OR_1.2 R66_PWR_PROT_0.2 R66_PWR_PROT_1.2 R66_PWR_PROT_2.2 R66_PWR_PROT_3.2 R66_PWR_PROT_4.2 R66_PWR_PROT_5.2 U4.2 U5.2 U6.2 U11.2 U11.4 U13_PWR_PROT_0.8 U13_PWR_PROT_1.8 U13_PWR_PROT_2.8 U13_PWR_PROT_3.8 U13_PWR_PROT_4.8 U13_PWR_PROT_5.8
3V3_REG_EN_REG_21: R12_REG_21.1 R13_REG_21.1 U2_REG_21.7
3V3_REG_EN_REG_22: R12_REG_22.1 R13_REG_22.1 U2_REG_22.7
5V0_INT: C61.1 R48.1 U10.2 U10.4
5V_AUX_ENABLE: R18_REG_1.2
5V_ENABLE_REG_0: R18_REG_0.2
5V_REG_EN_REG_0: R18_REG_0.1 R19_REG_0.1 U3_REG_0.7
5V_REG_EN_REG_1: R18_REG_1.1 R19_REG_1.1 U3_REG_1.7
5V_REG_FB_REG_0: C23_REG_0.2 C24_REG_0.2 C25_REG_0.2 C26_REG_0.2 L3_REG_0.2 R15_REG_0.1 U3_REG_0.6
5V_REG_FB_REG_1: C23_REG_1.2 C24_REG_1.2 C25_REG_1.2 C26_REG_1.2 L3_REG_1.2 R15_REG_1.1 U3_REG_1.6
ADC_MISO: U4.15 U5.15 U6.15
ADC_MOSI: U4.14 U5.14 U6.14
ADC_nCS0: U4.1
ADC_nCS1: U5.1
ADC_nCS2: U6.1
ADC_SCLK: U4.16 U5.16 U6.16
AMBIENT_TEMP: R23.1 R24.2
APM_VCC: C71_OR_1.1 J1.4 J1.5 J1.12 J1.13 J1.19 J1.20 Q7_OR_1.3 U12_OR_1.2
BOOT: C50.1 R33.1 R35.2 U7.45
CAN1_RX: U7.33
CAN1_TX: U7.34
CAN2_RX: U7.42
CAN2_TX: U7.43
CAN_INH: R29.2
CAN_MISO: U9.6
CAN_MOSI: U9.11
CAN_N: C56.1 D8.1 J1.8 L4.4 R45.2 R46.2
CAN_nCS: U9.14
CAN_P: C58.2 D8.2 J1.7 L4.1 R46.1 R47.1
CAN_RX: U9.4
CAN_SCLK: U9.8
CAN_TX: U9.1
CAN_VSUP: D7.2
CAR_VCC: C71_OR_0.1 J1.1 J1.2 J1.9 J1.10 J1.16 J1.17 Q7_OR_0.3 U12_OR_0.2
DGATE_OR_0: Q7_OR_0.1 U12_OR_0.1
DGATE_OR_1: Q7_OR_1.1 U12_OR_1.1
GND: C1.1 C2.1 C3.1 C5.1 C6.1 C7.1 C8.1 C9.1 C10.1 C12_REG_21.1 C12_REG_22.1 C13_REG_21.1 C13_REG_22.1 C14_REG_21.1 C14_REG_22.1 C15_REG_21.1 C15_REG_22.1 C16_REG_21.1 C16_REG_22.1 C17_REG_21.1 C17_REG_22.1 C18_REG_21.1 C18_REG_22.1 C20_REG_0.1 C20_REG_1.1 C21_REG_0.1 C21_REG_1.1 C22_REG_0.1 C22_REG_1.1 C23_REG_0.1 C23_REG_1.1 C24_REG_0.1 C24_REG_1.1 C25_REG_0.1 C25_REG_1.1 C26_REG_0.1 C26_REG_1.1 C27.2 C28.2 C29.2 C30.2 C31.2 C32.2 C33.2 C34.2 C35.2 C36.2 C37.2 C38.2 C39.2 C40.2 C41.2 C42.2 C43.2 C44.2 C45.2 C46.2 C47.2 C48.2 C49.2 C51.2 C52.2 C53.2 C54.2 C55.2 C56.2 C57.2 C58.1 C59.1 C60.2 C61.2 C62.2 C63.2 C64_OR_0.1 C64_OR_1.1 C65_OR_0.2 C65_OR_1.2 C68_OR_0.2 C68_OR_1.2 C70_OR_0.1 C70_OR_1.1 C71_OR_0.2 C71_OR_1.2 C72_OR_0.2 C72_OR_1.2 C73_OR_0.1 C73_OR_1.1 C74_PWR_PROT_0.2 C74_PWR_PROT_1.2 C74_PWR_PROT_2.2 C74_PWR_PROT_3.2 C74_PWR_PROT_4.2 C74_PWR_PROT_5.2 C75.2 C76.1 C77.1 C78.2 C79.2 C80.2 C81.2 C82.2 C83.2 D1.2 D2_REG_21.2 D2_REG_22.2 D3_REG_0.2 D3_REG_1.2 D4.1 D4.4 D8.3 D9_OR_0.2 D9_OR_1.2 D10_OR_0.2 D10_OR_1.2 D11_PWR_PROT_0.2 D11_PWR_PROT_1.2 D11_PWR_PROT_2.2 D11_PWR_PROT_3.2 D11_PWR_PROT_4.2 D11_PWR_PROT_5.2 J1.3 J1.6 J1.11 J1.14 J1.15 J1.18 J1.21 J1.22 J1.23 J2.03 J2.05 Q6.2 R2.2 R4.2 R7.2 R8.1 R10_REG_21.2 R10_REG_22.2 R13_REG_21.2 R13_REG_22.2 R14_REG_21.1 R14_REG_22.1 R16_REG_0.2 R16_REG_1.2 R19_REG_0.2 R19_REG_1.2 R20_REG_0.1 R20_REG_1.1 R24.1 R35.1 R39.1 R42.1 R49.2 R51.2 R53_OR_0.1 R53_OR_1.1 R60_OR_0.1 R60_OR_1.1 R61_OR_0.1 R61_OR_1.1 R62_OR_0.1 R62_OR_1.1 R64_OR_0.1 R64_OR_1.1 R68_PWR_PROT_0.1 R68_PWR_PROT_1.1 R68_PWR_PROT_2.1 R68_PWR_PROT_3.1 R68_PWR_PROT_4.1 R68_PWR_PROT_5.1 SW2.2 SW3.1 U1.4 U1.8 U2_REG_21.4 U2_REG_21.8 U2_REG_22.4 U2_REG_22.8 U3_REG_0.4 U3_REG_0.8 U3_REG_1.4 U3_REG_1.8 U4.3 U4.12 U5.3 U5.12 U6.3 U6.12 U7.19 U7.23 U7.35 U7.47 U8.5 U9.2 U10.1 U11.1 U12_OR_0.13 U12_OR_1.13 U13_PWR_PROT_0.5 U13_PWR_PROT_1.5 U13_PWR_PROT_2.5 U13_PWR_PROT_3.5 U13_PWR_PROT_4.5 U13_PWR_PROT_5.5 Y1.2 Y1.4
I_nFAULT: R38.1 U8.6
I_SENSE: R37.1
IN_A0: U4.4
IN_A1: U4.5
IN_A2: U4.6
IN_A3: U4.7
IN_A4: U4.8
IN_A5: U4.9
IN_A6: U4.10
IN_A7: U4.11
IN_B0: U5.4
IN_B1: U5.5
IN_B2: U5.6
IN_B3: U5.7
IN_B4: U5.8
IN_B5: U5.9
IN_B6: U5.10
IN_B7: U5.11
IN_C0: U6.4
IN_C1: U6.5
IN_C2: U6.6
IN_C3: U6.7
IN_C4: U6.8
IN_C5: U6.9
IN_C6: U6.10
IN_C7: U6.11
INH: R41.1
INT_3V3: C52.1 C54.1 R5.2 R11_REG_21.1 R11_REG_22.1 R17_REG_0.1 R17_REG_1.1 R38.2 U8.8 U9.5
INT_5V: C53.1 U9.3
ISCP_OR_0: C69_OR_0.1 R55_OR_0.1 U12_OR_0.18
ISCP_OR_1: C69_OR_1.1 R55_OR_1.1 U12_OR_1.18
JETSON_VCC: C76.2 C77.2 C80.1 C81.1 C82.1 C83.1 L5.2
LPUART1_RX: U7.11
LPUART1_TX: U7.10
MCU_G_LED: D5.1
MCU_R_LED: D5.4
NetC4_1: C4.1 U1.3
NetC4_2: C4.2 D1.1 L1.1 U1.1
NetC11_REG_21_1: C11_REG_21.1 U2_REG_21.3
NetC11_REG_21_2: C11_REG_21.2 D2_REG_21.1 L2_REG_21.1 U2_REG_21.1
NetC11_REG_22_1: C11_REG_22.1 U2_REG_22.3
NetC11_REG_22_2: C11_REG_22.2 D2_REG_22.1 L2_REG_22.1 U2_REG_22.1
NetC19_REG_0_1: C19_REG_0.1 U3_REG_0.3
NetC19_REG_0_2: C19_REG_0.2 D3_REG_0.1 L3_REG_0.1 U3_REG_0.1
NetC19_REG_1_1: C19_REG_1.1 U3_REG_1.3
NetC19_REG_1_2: C19_REG_1.2 D3_REG_1.1 L3_REG_1.1 U3_REG_1.1
NetC28_1: C28.1 C29.1 R21.2 U4.13
NetC31_1: C31.1 C32.1 R22.2 U5.13
NetC34_1: C34.1 C35.1 R25.2 U6.13
NetC55_1: C55.1 D7.1 R43.2 U9.10
NetC57_1: C57.1 R43.1 R44.2 SW3.2
NetC66_OR_0_1: C66_OR_0.1 R56_OR_0.1 U12_OR_0.20
NetC66_OR_0_2: C66_OR_0.2 C69_OR_0.2 Q8_OR_0.4 R54_OR_0.2 U12_OR_0.19
NetC66_OR_1_1: C66_OR_1.1 R56_OR_1.1 U12_OR_1.20
NetC66_OR_1_2: C66_OR_1.2 C69_OR_1.2 Q8_OR_1.4 R54_OR_1.2 U12_OR_1.19
NetC67_OR_0_2: C67_OR_0.2 U12_OR_0.23
NetC67_OR_1_2: C67_OR_1.2 U12_OR_1.23
NetC70_OR_0_2: C70_OR_0.2 R57_OR_0.1
NetC70_OR_1_2: C70_OR_1.2 R57_OR_1.1
NetC72_OR_0_1: C72_OR_0.1 R59_OR_0.1 R60_OR_0.2 U12_OR_0.4
NetC72_OR_1_1: C72_OR_1.1 R59_OR_1.1 R60_OR_1.2 U12_OR_1.4
NetC73_OR_0_2: C73_OR_0.2 U12_OR_0.9
NetC73_OR_1_2: C73_OR_1.2 U12_OR_1.9
NetC75_1: C75.1 C78.1 C79.1 L5.1 R67_PWR_PROT_0.2 U13_PWR_PROT_0.3 U13_PWR_PROT_0.4
NetD4_2: D4.2 R27.1
NetD4_3: D4.3 R28.1
NetD5_2: D5.2 R31.1
NetD5_3: D5.3 R32.1
NetD9_OR_0_1: D9_OR_0.1 R52_OR_0.1 R53_OR_0.2
NetD9_OR_1_1: D9_OR_1.1 R52_OR_1.1 R53_OR_1.2
NetD10_OR_0_1: D10_OR_0.1 R61_OR_0.2 U12_OR_0.10
NetD10_OR_1_1: D10_OR_1.1 R61_OR_1.2 U12_OR_1.10
NetD11_PWR_PROT_0_1: D11_PWR_PROT_0.1 R67_PWR_PROT_0.1 R68_PWR_PROT_0.2
NetD11_PWR_PROT_1_1: D11_PWR_PROT_1.1 R67_PWR_PROT_1.1 R68_PWR_PROT_1.2
NetD11_PWR_PROT_2_1: D11_PWR_PROT_2.1 R67_PWR_PROT_2.1 R68_PWR_PROT_2.2
NetD11_PWR_PROT_3_1: D11_PWR_PROT_3.1 R67_PWR_PROT_3.1 R68_PWR_PROT_3.2
NetD11_PWR_PROT_4_1: D11_PWR_PROT_4.1 R67_PWR_PROT_4.1 R68_PWR_PROT_4.2
NetD11_PWR_PROT_5_1: D11_PWR_PROT_5.1 R67_PWR_PROT_5.1 R68_PWR_PROT_5.2
NetF1_2: F1.2 Q2.5-6-7-8 Q3.5-6-7-8
NetF2_PWR_PROT_0_2: F2_PWR_PROT_0.2 U13_PWR_PROT_0.1 U13_PWR_PROT_0.2
NetF2_PWR_PROT_1_2: F2_PWR_PROT_1.2 U13_PWR_PROT_1.1 U13_PWR_PROT_1.2
NetF2_PWR_PROT_2_2: F2_PWR_PROT_2.2 U13_PWR_PROT_2.1 U13_PWR_PROT_2.2
NetF2_PWR_PROT_3_2: F2_PWR_PROT_3.2 U13_PWR_PROT_3.1 U13_PWR_PROT_3.2
NetF2_PWR_PROT_4_2: F2_PWR_PROT_4.2 U13_PWR_PROT_4.1 U13_PWR_PROT_4.2
NetF2_PWR_PROT_5_2: F2_PWR_PROT_5.2 U13_PWR_PROT_5.1 U13_PWR_PROT_5.2
NetQ1_1: Q1.1 R29.1 R30.1
NetQ1_3: Q1.3 R28.2
NetQ6_1: Q6.1 R41.2 R42.2
NetQ8_OR_0_1: Q8_OR_0.1 R57_OR_0.2 U12_OR_0.14
NetQ8_OR_1_1: Q8_OR_1.1 R57_OR_1.2 U12_OR_1.14
NetR1_2: R1.2 R2.1
NetR9_REG_21_2: R9_REG_21.2 R10_REG_21.1
NetR9_REG_22_2: R9_REG_22.2 R10_REG_22.1
NetR15_REG_0_2: R15_REG_0.2 R16_REG_0.1
NetR15_REG_1_2: R15_REG_1.2 R16_REG_1.1
NetR33_2: R33.2 SW1.1
NetR34_2: R34.2 SW2.1
NetR37_2: R37.2 U8.7
NetR44_1: R44.1 U9.9
NetR58_OR_0_1: R58_OR_0.1 U12_OR_0.12
NetR58_OR_1_1: R58_OR_1.1 U12_OR_1.12
NetR59_OR_0_2: R59_OR_0.2 R63_OR_0.2 U12_OR_0.3
NetR59_OR_1_2: R59_OR_1.2 R63_OR_1.2 U12_OR_1.3
NetR62_OR_0_2: R62_OR_0.2 U12_OR_0.11
NetR62_OR_1_2: R62_OR_1.2 U12_OR_1.11
NetR63_OR_0_1: R63_OR_0.1 R64_OR_0.2 U12_OR_0.5
NetR63_OR_1_1: R63_OR_1.1 R64_OR_1.2 U12_OR_1.5
NetR65_PWR_PROT_0_1: R65_PWR_PROT_0.1 U13_PWR_PROT_0.7
NetR65_PWR_PROT_0_2: R65_PWR_PROT_0.2
NetR65_PWR_PROT_1_1: R65_PWR_PROT_1.1 U13_PWR_PROT_1.7
NetR65_PWR_PROT_1_2: R65_PWR_PROT_1.2
NetR65_PWR_PROT_2_1: R65_PWR_PROT_2.1 U13_PWR_PROT_2.7
NetR65_PWR_PROT_2_2: R65_PWR_PROT_2.2
NetR65_PWR_PROT_3_1: R65_PWR_PROT_3.1 U13_PWR_PROT_3.7
NetR65_PWR_PROT_3_2: R65_PWR_PROT_3.2
NetR65_PWR_PROT_4_1: R65_PWR_PROT_4.1 U13_PWR_PROT_4.7
NetR65_PWR_PROT_4_2: R65_PWR_PROT_4.2
NetR65_PWR_PROT_5_1: R65_PWR_PROT_5.1 U13_PWR_PROT_5.7
NetR65_PWR_PROT_5_2: R65_PWR_PROT_5.2
NetR66_PWR_PROT_0_1: R66_PWR_PROT_0.1 U13_PWR_PROT_0.6
NetR66_PWR_PROT_1_1: R66_PWR_PROT_1.1 U13_PWR_PROT_1.6
NetR66_PWR_PROT_2_1: R66_PWR_PROT_2.1 U13_PWR_PROT_2.6
NetR66_PWR_PROT_3_1: R66_PWR_PROT_3.1 U13_PWR_PROT_3.6
NetR66_PWR_PROT_4_1: R66_PWR_PROT_4.1 U13_PWR_PROT_4.6
NetR66_PWR_PROT_5_1: R66_PWR_PROT_5.1 U13_PWR_PROT_5.6
NetU12_OR_0_7: U12_OR_0.7
NetU12_OR_1_7: U12_OR_1.7
PRE_CAN_N: L4.3 U9.12
PRE_CAN_P: L4.2 U9.13
PRE_SHUNT: Q4.5-6-7-8 Q5.5-6-7-8 U8.1 U8.2
PRE_VCC: D6.1 Q2.1 Q2.2 Q2.3 Q3.1 Q3.2 Q3.3 Q4.1 Q4.2 Q4.3 Q5.1 Q5.2 Q5.3 R40.2
PWR_IN: C64_OR_0.2 C64_OR_1.2 C65_OR_0.1 C65_OR_1.1 F1.1 Q8_OR_0.3 Q8_OR_1.3 U12_OR_0.15 U12_OR_0.16 U12_OR_1.15 U12_OR_1.16
PWR_IN_REG_0: C20_REG_0.2 C21_REG_0.2 C22_REG_0.2 R67_PWR_PROT_1.2 U3_REG_0.2 U13_PWR_PROT_1.3 U13_PWR_PROT_1.4
PWR_IN_REG_1: C20_REG_1.2 C21_REG_1.2 C22_REG_1.2 R67_PWR_PROT_2.2 U3_REG_1.2 U13_PWR_PROT_2.3 U13_PWR_PROT_2.4
PWR_IN_REG_21: C12_REG_21.2 C13_REG_21.2 R67_PWR_PROT_4.2 U2_REG_21.2 U13_PWR_PROT_4.3 U13_PWR_PROT_4.4
PWR_IN_REG_22: C12_REG_22.2 C13_REG_22.2 R67_PWR_PROT_3.2 U2_REG_22.2 U13_PWR_PROT_3.3 U13_PWR_PROT_3.4
PWR_MOSFET: Q4.4 Q5.4 Q6.3 R40.1
PWR_OUT: C60.1 C62.1 F2_PWR_PROT_0.1 F2_PWR_PROT_1.1 F2_PWR_PROT_2.1 F2_PWR_PROT_3.1 F2_PWR_PROT_4.1 F2_PWR_PROT_5.1 U8.3 U8.4 U10.3 U11.3
RESETN: C51.1 J2.10 R34.1 R36.2 U7.7
RP_MOS_LINK: D6.2 Q2.4 Q3.4 R39.2
SPI1_MISO: U7.14
SPI1_MOSI: U7.15
SPI1_nCS: U7.12
SPI1_SCLK: U7.13
SPI2_MISO: U7.28
SPI2_MOSI: U7.29
SPI2_nCS: U7.26
SPI2_SCLK: U7.27
SWCLK: J2.04 R26.1 U7.38
SWDIO: J2.02 U7.37
SWO: J2.06 U7.40
TEMP_SENSE: R5.1 R8.2
TEMP_SENSE_REG_0: R17_REG_0.2 R20_REG_0.2
TEMP_SENSE_REG_1: R17_REG_1.2 R20_REG_1.2
TEMP_SENSE_REG_21: R11_REG_21.2 R14_REG_21.2
TEMP_SENSE_REG_22: R11_REG_22.2 R14_REG_22.2
TERM_CAP: C59.2 R45.1 R47.2
VCC: Q1.2 R30.2
VDDA: C40.1 C41.1 C44.1 C45.1 FB1.2 U7.20 U7.21
VS_OR_0: C67_OR_0.1 C68_OR_0.1 Q7_OR_0.4 R52_OR_0.2 R54_OR_0.1 R55_OR_0.2 R56_OR_0.2 U12_OR_0.6 U12_OR_0.22 U12_OR_0.24
VS_OR_1: C67_OR_1.1 C68_OR_1.1 Q7_OR_1.4 R52_OR_1.2 R54_OR_1.1 R55_OR_1.2 R56_OR_1.2 U12_OR_1.6 U12_OR_1.22 U12_OR_1.24
X32_N: C49.1 U7.4 Y2.2
X32_P: C48.1 U7.3 Y2.1
X_N: C46.1 U7.6 Y1.1
X_P: C47.1 U7.5 Y1.3
pads on no net: C1.2 C2.2 C3.2 J1. J2.07 J2.08 J2.09 R67_PWR_PROT_5.2 U1.2 U1.5 U2_REG_21.5 U2_REG_22.5 U3_REG_0.5 U3_REG_1.5 U7.2 U7.8 U7.9 U7.16 U7.17 U7.18 U7.22 U7.25 U7.30 U7.31 U7.32 U7.39 U7.41 U7.44 U7.46 U9.7 U12_OR_0.8 U12_OR_0.17 U12_OR_0.21 U12_OR_0.25 U12_OR_1.8 U12_OR_1.17 U12_OR_1.21 U12_OR_1.25 U13_PWR_PROT_5.3 U13_PWR_PROT_5.4
copper on no net:
  other v1: 12970.48,7222.44 13013.79,7222.44 12970.48,7265.75 13013.79,7265.75 12734.26,7694.89 12777.57,7694.89 12734.26,7738.19 12777.57,7738.19

## Text inside footprints (layer, text, board x,y; h text height)
U9: Top 3D Body "*" at 10551.56,6133.87 h50; Top Overlay "*" at 10507.31,6168.44 h50